# EAGLE board DA-2000 (EAGLE 9.5.2)
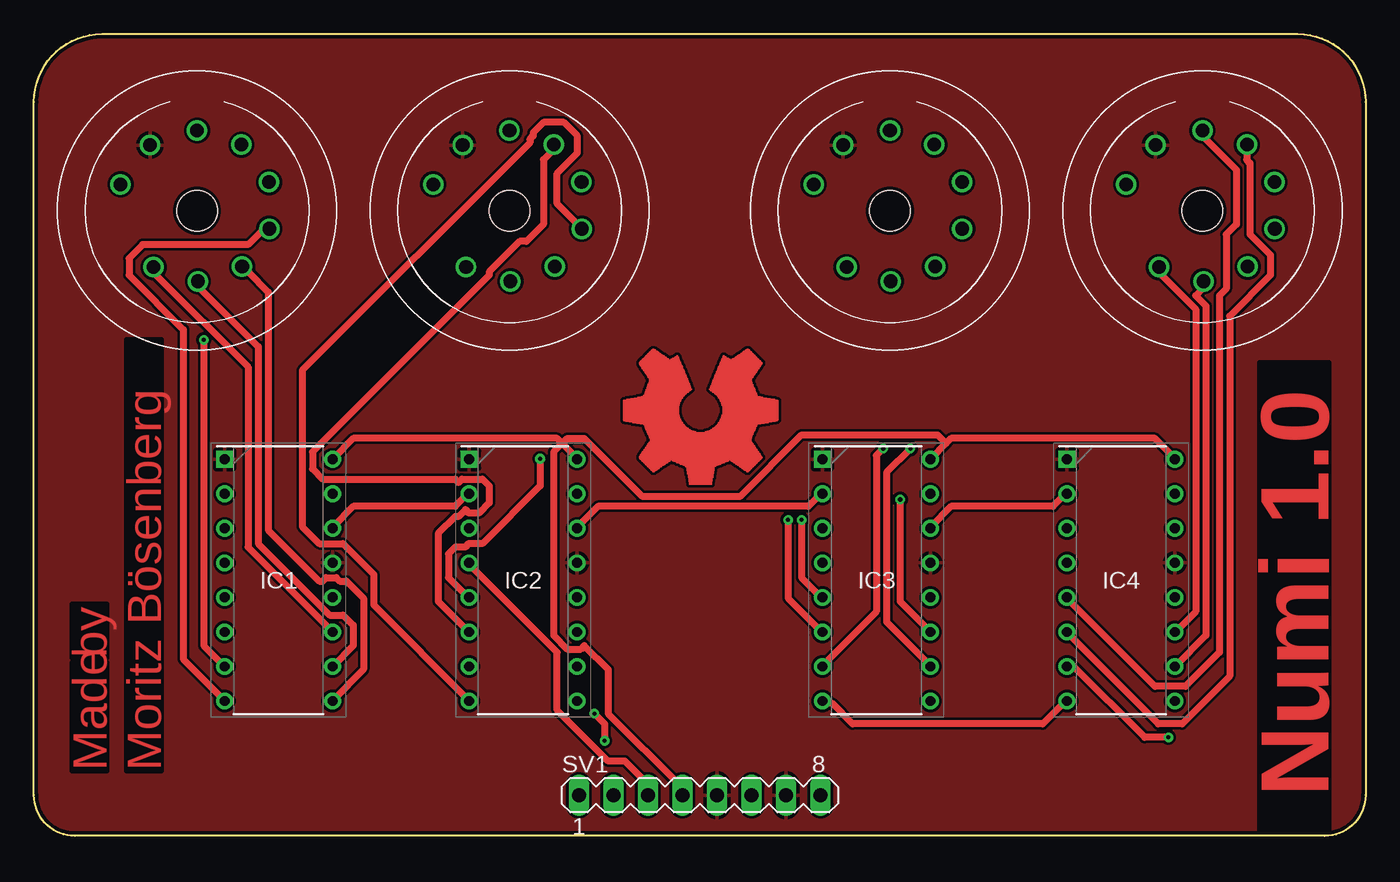
[diagram p0: board, top side]
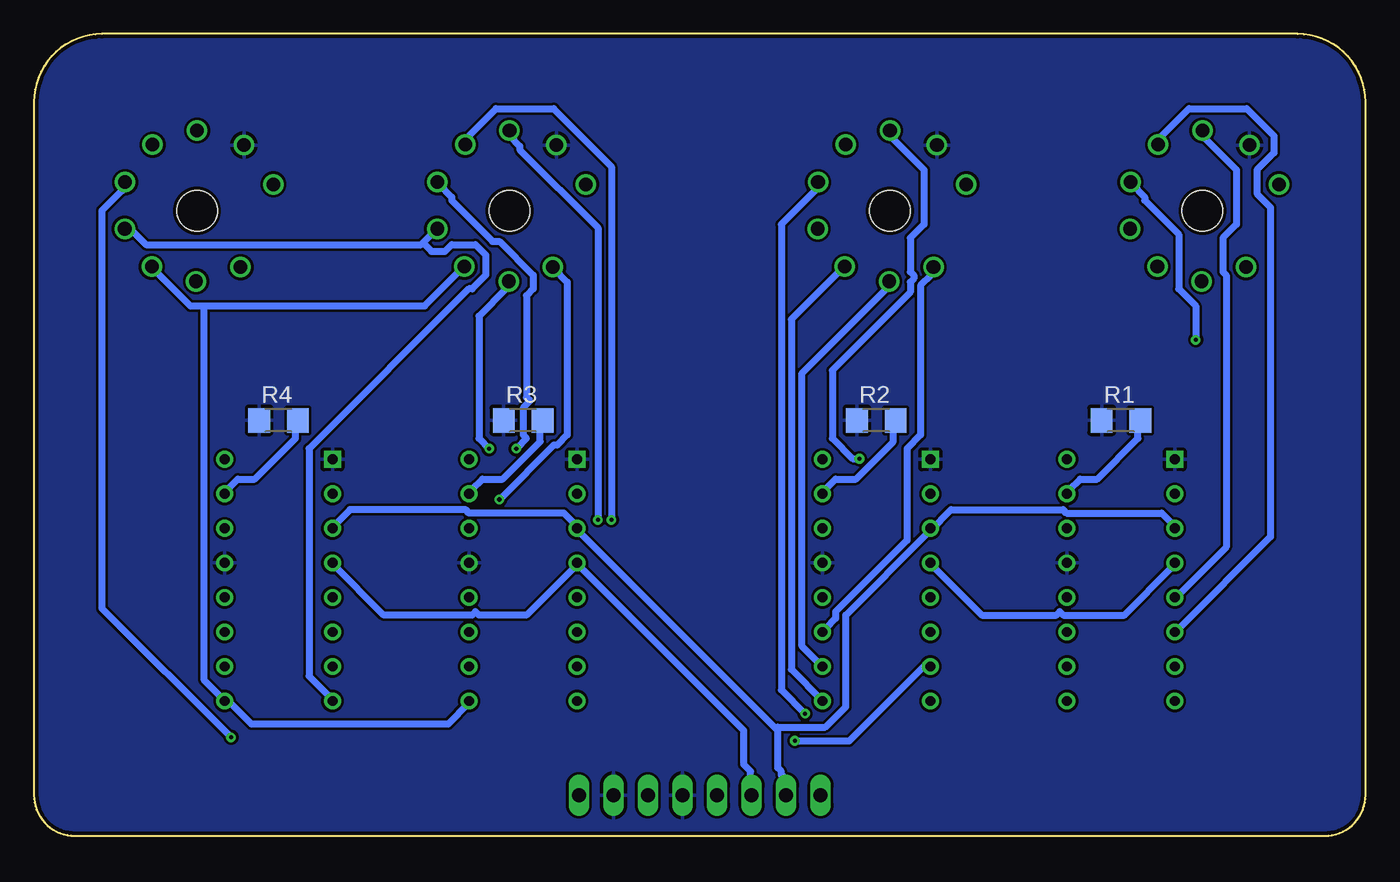
[diagram p1: board, bottom side, seen from below]

Size 98 x 59 mm. Coordinates in mm from the lower left corner, seen from the top.
Outline: 0,3 0,54 arc-90 5,59 93,59 arc-90 98,54 98,3 arc-90 95,0 3,0 arc-90 0,3
Copper layers (1*16): Top 0.035mm / dielectric 1.5mm / Bottom 0.035mm
Design rules "default *": minimum track width 6mil, minimum drill 0.25mm, track to track 6mil, track to pad 6mil, pad to pad 6mil, via to via 6mil, smd to smd 6mil, copper to edge 10mil, drill to drill 6mil, minimum pad ring 10mil, minimum via ring 8mil, stop-mask expansion 4mil, vias tented up to drill 0mil, thermal gap 10mil
Net classes: 0 default: width 0.5 mm, drill 0.3 mm, clearance 0.2 mm; 1 other: width 0.5 mm, drill 0.2 mm, clearance 0.2 mm

## Footprints (pad centres in the part's own frame; a part is rotated, then mirrored left to right if it is on the bottom)
DIP794W53P254L1930H508Q16N = drill 0.73 pad 1.13 square: 1 -3.97,8.89 | drill 0.73 pad 1.13: 2 -3.97,6.35; 3 -3.97,3.81; 4 -3.97,1.27; 5 -3.97,-1.27; 6 -3.97,-3.81; 7 -3.97,-6.35; 8 -3.97,-8.89; 9 3.97,-8.89; 10 3.97,-6.35; 11 3.97,-3.81; 12 3.97,-1.27; 13 3.97,1.27; 14 3.97,3.81; 15 3.97,6.35; 16 3.97,8.89
R1206 = smd 1.6 x 1.803: 1 -1.422,0; 2 1.422,0
MA08-1 = drill 1.016 long: 1 -8.89,0; 2 -6.35,0; 3 -3.81,0; 4 -1.27,0; 5 1.27,0; 6 3.81,0; 7 6.35,0; 8 8.89,0
DA-2000 = drill 1: 1 5.621,-1.938; 2 3.454,-4.832; 3 0,-5.9; 4 -3.267,-4.86; 5 -5.299,-2.099; 6 -5.32,1.33; 7 -3.321,4.116; 8 -0.067,5.195; 9 3.2,4.155 | hole 3: 0,0

## Placement (x,y rotation side)
IC1  TLC5916IN  [DIP794W53P254L1930H508Q16N]  18,18.82 0 top
IC2  TLC5916IN  [DIP794W53P254L1930H508Q16N]  36,18.82 0 top
IC3  TLC5916IN  [DIP794W53P254L1930H508Q16N]  62,18.82 0 top
IC4  TLC5916IN  [DIP794W53P254L1930H508Q16N]  80,18.82 0 top
R1  1K  [R1206]  18,30.58 0 bottom
R2  1K  [R1206]  36,30.58 0 bottom
R3  1K  [R1206]  62,30.58 0 bottom
R4  1K  [R1206]  80,30.58 0 bottom
SV1  [MA08-1]  49,3 0 top
TUBE1  [DA-2000]  12,46 180 top
TUBE2  [DA-2000]  35,46 180 top
TUBE3  [DA-2000]  63,46 180 top
TUBE4  [DA-2000]  86,46 180 top

## Library data of the parts
IC1-IC4 = NixieTube; DESCRIPTION: 8-CHANNEL CONSTANT-CURRENT LED SINK DRIVERS; HEIGHT: 5.08mm; MANUFACTURER_NAME: Texas Instruments; MANUFACTURER_PART_NUMBER: TLC5916IN; MOUSER_PART_NUMBER: 595-TLC5916IN; MOUSER_PRICE-STOCK: https://www.mouser.com/Search/Refine.aspx?Keyword=595-TLC5916IN
R1-R4 = rcl; SPICEPREFIX: R
SV1 = con-lstb; OC_FARNELL: unknown; OC_NEWARK: unknown
TUBE1-TUBE4 = NixieTube

## Nets
3.3V: SV1.8
5V: IC1.16 IC2.16 IC3.16 IC4.16 SV1.4
DS: SV1.1
GND: IC1.1 IC1.13 IC2.1 IC2.13 IC3.1 IC3.13 IC4.1 IC4.13 R1.1 R2.1 R3.1 R4.1 SV1.5 SV1.7 TUBE1.2 TUBE2.2 TUBE3.2 TUBE4.2
N$1: IC3.8 IC4.8 TUBE3.6 TUBE4.6
N$2: IC3.9 IC4.9 TUBE3.7 TUBE4.7
N$3: IC1.5 TUBE1.3
N$4: IC1.6 TUBE1.4
N$5: IC1.7 TUBE1.5
N$6: IC1.8 TUBE1.6
N$8: IC1.9 TUBE1.7
N$10: IC1.10 TUBE1.8
N$11: IC1.11 TUBE1.9
N$12: IC2.5 TUBE2.3
N$14: IC2.6 TUBE2.4
N$33: IC2.7 TUBE2.5
N$34: IC2.8 TUBE2.6
N$37: IC2.9 TUBE2.7
N$38: IC2.10 TUBE2.8
N$39: IC2.11 TUBE2.9
N$40: IC3.5 TUBE3.3
N$41: IC3.6 TUBE3.4
N$42: IC3.7 TUBE3.5
N$43: IC4.5 TUBE4.3
N$44: IC4.6 TUBE4.4
N$45: IC3.10 TUBE3.8
N$46: IC3.11 TUBE3.9
N$47: IC4.7 TUBE4.5
N$49: IC1.14 IC2.2
N$50: IC4.10 TUBE4.8
N$51: IC4.11 TUBE4.9
N$52: IC2.14 IC3.2
N$53: IC3.14 IC4.2
NC: SV1.6
R-EXT1: IC1.15 R1.2
R-EXT2: IC2.15 R2.2
R-EXT3: IC3.15 R3.2
R-EXT4: IC4.15 R4.2
SD [other]: IC1.2
SH_CP: IC1.3 IC2.3 IC3.3 IC4.3 SV1.2
ST_CP: IC1.4 IC2.4 IC3.4 IC4.4 SV1.3

## Tracks (layer width: path | path; a pad name or v marks a point on that pad's centre or on a via)
5V
  Top 0.5: 67.12,28.88 67.5,29.25 82.5,29.25 84,27.75 IC4.16 | 67.12,28.88 66,27.75 IC3.16 | 38.88,28.88 40,27.75 IC2.16 | 38.88,28.88 38.5,29.25 23.5,29.25 22,27.75 IC1.16 | 38.88,28.88 38.25,28.25 38.25,14.75 39.25,13.75 40.25,13.75 40.5,14 42.25,12.25 42.25,9 47.5,3.75 47.5,3 SV1.4 | 67.12,28.88 66.5,29.5 56.5,29.5 52,25 44.75,25 40.5,29.25 39.25,29.25 38.88,28.88
GND
  pour Top: 0,59 98,59 98,0 0,0
  pour Bottom: 0,59 98,59 98,0 0,0
N$1
  Top 0.5: IC3.8 58.25,9.75 58.75,9.75 60.25,8.25 74.25,8.25 76,10 IC4.8
  Bottom 0.5: 69.38,43.62 69.5,43.5 89.75,43.5 90.75,44.5 91.25,44.5 TUBE4.6 | 69.38,43.62 68.5,44.5 TUBE3.6 | 69.38,43.62 68.75,43 67.75,43 67.25,43.5 65.5,43.5 64.75,42.75 64.75,41.25 65.75,40.25 66,40.25 77.75,28.5 77.75,11.75 76.25,10.25 76.25,10 IC4.8
N$2
  Bottom 0.5: IC3.9 66,9.75 67.5,8.25 82,8.25 83.75,10 IC4.9 84,10 85.5,11.5 85.5,39 | 85.5,39 86.5,39 89.25,41.75 TUBE4.7 | 85.5,39 69.25,39 66.5,41.75 TUBE3.7
N$3
  Bottom 0.5: TUBE1.3 12,51.5 9.5,49 9.5,45 10.5,44 10.5,41.5 10.25,41.25 10.25,21.25 13.75,17.75 14,17.75 IC1.5
N$4
  Bottom 0.5: IC1.6 14,15.25 13.75,15.25 7,22 7,46.25 8,47.25 8,49 6.75,50.25 6.75,51.5 8.75,53.5 13,53.5 15.5,51 TUBE1.4
N$5  (via drill 0.3)
  Top 0.5: v12.5,36.5 12.5,14 14,12.5 IC1.7
  Bottom 0.5: v12.5,36.5 12.5,39 13.75,40.25 13.75,44.25 16.25,46.75 16.25,47 17.25,48 TUBE1.5
N$6
  Top 0.5: IC1.8 14,10 11,13 11,37.25 7,41.25 7,42.5 8,43.5 15.75,43.5 16.75,44.5 17.25,44.5 TUBE1.6
N$8
  Top 0.5: IC1.9 22,10 24.25,12.25 24.25,17.5 23,18.75 22.5,18.75 22.25,19 21.5,19 21.25,18.75 21,18.75 17.25,22.5 17.25,40 15.75,41.5 15.5,41.5 15.25,41.75 TUBE1.7
N$10
  Top 0.5: IC1.10 22,12.5 23.5,14 23.5,15.5 22.75,16.25 21.75,16.25 16.5,21.5 16.5,36 12.25,40.25 12.25,40.75 TUBE1.8
N$11
  Top 0.5: IC1.11 21.75,15.25 15.75,21.25 15.75,34.5 9,41.25 9,41.75 TUBE1.9
N$12  (via drill 0.3)
  Top 0.5: v37.25,27.75 37.25,25.75 33,21.5 32,21.5 31.75,21.25 31,21.25 30.5,20.75 30.5,19 31.75,17.75 32,17.75 IC2.5
  Bottom 0.5: v37.25,27.75 37.75,27.75 39.25,29.25 39.25,34.25 33.5,40 33.5,40.75 33.25,41 33.25,41.25 33.5,41.5 33.5,44 32.5,45 32.5,49 35,51.5 TUBE2.3
N$14
  Top 0.5: IC2.6 32,15.25 31.75,15.25 29.75,17.25 29.75,22.25 31,23.5 31.25,23.5 31.75,24 32,23.75 32.75,23.75 33.5,24.5 33.5,25.75 33,26.25 31.5,26.25 31.25,26 31,26.25 21.25,26.25 20.5,27 20.5,28.25 33.5,41.25 33.5,41.5 35.75,43.75 36.25,43.75 37.5,45 37.5,49.75 38.5,50.75 TUBE2.4
N$33  (via drill 0.3)
  Top 0.5: v42,7 42,8.25 v41.25,9
  Bottom 0.5: v42,7 38,7 32.5,12.5 32.25,12.5 IC2.7 | v41.25,9 43,10.75 43,45 40.5,47.5 40.5,48 TUBE2.5
N$34
  Top 0.5: IC2.8 32,10 25,17 25,19.25 22.75,21.5 21,21.5 19.75,22.75 19.75,34.25 36.5,51 36.5,51.25 36.75,51.5 36.75,51.75 37.5,52.5 39,52.5 40,51.5 40,50.25 38.5,48.75 38.5,46.5 40.25,44.75 TUBE2.6
N$37
  Bottom 0.5: IC2.9 40,10 42.25,12.25 42.25,38 38.75,41.5 38.5,41.5 38.25,41.75 TUBE2.7
N$38
  Bottom 0.5: IC2.10 40,12.5 41.5,14 41.5,34 35.25,40.25 35.25,40.75 TUBE2.8
N$39
  Bottom 0.5: IC2.11 39.75,15.25 39,16 39,16.5 33.75,21.75 33.75,28.5 32.75,29.5 32.75,40.5 32,41.25 32,41.75 TUBE2.9
N$40  (via drill 0.3)
  Top 0.5: v56.5,23.25 56.5,19 57.75,17.75 58,17.75 IC3.5
  Bottom 0.5: v56.5,23.25 56.5,44.75 62.25,50.5 62.25,50.75 63,51.5 TUBE3.3
N$41  (via drill 0.3)
  Top 0.5: v55.5,23.25 55.5,17.5 57.75,15.25 58,15.25 IC3.6
  Bottom 0.5: v55.5,23.25 55.5,49.25 59.75,53.5 64,53.5 66.5,51 TUBE3.4
N$42  (via drill 0.3)
  Top 0.5: v62.5,28.5 62,28 62,16.5 58.25,12.75 58.25,12.5 IC3.7
  Bottom 0.5: v62.5,28.5 61.75,29.25 62,29.5 62,31.5 61.5,32 61.75,32.25 61.75,39.75 61.25,40.25 61.25,41.25 63.75,43.75 64.25,43.75 67.25,46.75 67.25,47 68.25,48 TUBE3.5
N$43
  Top 0.5: TUBE4.3 86,51.5 88.5,49 88.5,45 87.75,44.25 87.75,40.25 87.25,39.75 87.25,13.5 84.75,11 82.5,11 76.25,17.25 76.25,17.5 IC4.5
N$44
  Top 0.5: IC4.6 76.25,15 76.25,14.75 82.75,8.25 84.5,8.25 88,11.75 88,38.25 91,41.25 91,42.75 89.5,44.25 89.5,49.5 89.25,49.75 89.25,50.75 TUBE4.4
N$45  (via drill 0.3)
  Top 0.5: v64.5,28.5 62.75,26.75 62.75,15.75 65.75,12.75 65.75,12.5 IC3.10
  Bottom 0.5: v64.5,28.5 65.25,29.25 65.25,38.25 63.25,40.25 63.25,40.75 TUBE3.8
N$46  (via drill 0.3)
  Top 0.5: v63.75,24.75 63.75,17.25 65.75,15.25 IC3.11
  Bottom 0.5: v63.75,24.75 59.75,28.75 59.5,28.75 58.75,29.5 58.75,40.75 59.75,41.75 TUBE3.9
N$47  (via drill 0.3)
  Top 0.5: v83.5,7.25 81.75,7.25 76.5,12.5 76.25,12.5 IC4.7
  Bottom 0.5: v83.5,7.25 93,16.75 93,46 91.5,47.5 91.5,48 TUBE4.5
N$49
  Top 0.5: IC1.14 22,22.75 23.5,24.25 31,24.25 32,25.25 IC2.2
N$50
  Top 0.5: IC4.10 84,12.5 86.25,14.75 86.25,39 85.5,39.75 86,40.25 86,40.75 TUBE4.8
N$51
  Top 0.5: IC4.11 84,15.25 84.25,15.25 85.5,16.5 85.5,38.75 83,41.25 83,41.75 TUBE4.9
N$52
  Top 0.5: IC2.14 40,22.75 41.5,24.25 57,24.25 58,25.25 IC3.2
N$53
  Top 0.5: IC3.14 66,22.75 67.5,24.25 75,24.25 76,25.25 IC4.2
R-EXT1
  Bottom 0.5: R1.2 16.75,30.5 16.75,29.25 19.75,26.25 21,26.25 21.75,25.5 22,25.5 22,25.25 IC1.15
R-EXT2
  Bottom 0.5: R2.2 34.75,30.5 34.75,29 37.5,26.25 39,26.25 39.75,25.5 40,25.5 40,25.25 IC2.15
R-EXT3
  Bottom 0.5: R3.2 60.75,30.5 60.75,29 63.5,26.25 65,26.25 65.75,25.5 66,25.5 66,25.25 IC3.15
R-EXT4
  Bottom 0.5: R4.2 78.75,30.5 78.75,29.25 81.75,26.25 83,26.25 83.75,25.5 84,25.5 84,25.25 IC4.15
SH_CP
  Bottom 0.5: IC1.3 14.25,22.75 14.25,23 15,23.75 22,23.75 22.25,24 30.5,24 32,22.5 IC2.3 32.25,22.5 32.25,22.25 38.25,16.25 38.25,9.5 39.75,8 43.25,8 43.38,7.88 | 43.38,7.88 43.25,7.75 43.25,5 43,4.75 43,4.5 42.75,4.25 42.75,3 SV1.2 | 43.38,7.88 58,22.5 IC3.3 57.75,22.5 57.75,22.75 58,23 58.25,23 59,23.75 66,23.75 66.25,24 74.75,24 76,22.75 IC4.3
ST_CP
  Top 0.5: IC2.4 32.25,20 32.25,19.75 38.5,13.5 38.5,9.25 42.25,5.5 43.5,5.5 45,4 45,3 SV1.3
  Bottom 0.5: IC1.4 14.25,20 14.25,19.75 17.75,16.25 22.25,16.25 22.5,16.5 22.75,16.25 28.25,16.25 31.75,19.75 31.75,20 32,20.25 IC2.4 | 58,20 45.75,7.75 45.75,5.25 45.25,4.75 45.25,3 SV1.3 | 58,20 61.75,16.25 65.25,16.25 65.5,16.5 65.75,16.25 72.25,16.25 76,20 IC4.4 | 58,20 IC3.4
(copper drawn outside any net)
  shapes: Top area x364

## Text on the board
Top: Numi 1.0 | by | Made | Moritz Bösenberg
tStop: Numi 1.0 | by | Made | Moritz Bösenberg